# Altium PCB LedBlinker Rats Nest.PcbDoc
Units mil, origin at the board's own origin, x right, y up, seen from the top; angles counter-clockwise.
Board outline 1050 x 1050 mil, 2 copper layers (Top Layer, Bottom Layer), stack 64.8 mil thick; 27 components, 31 nets, 96 pads, 0 vias.
Unrouted connection lines stored in the file: 54.
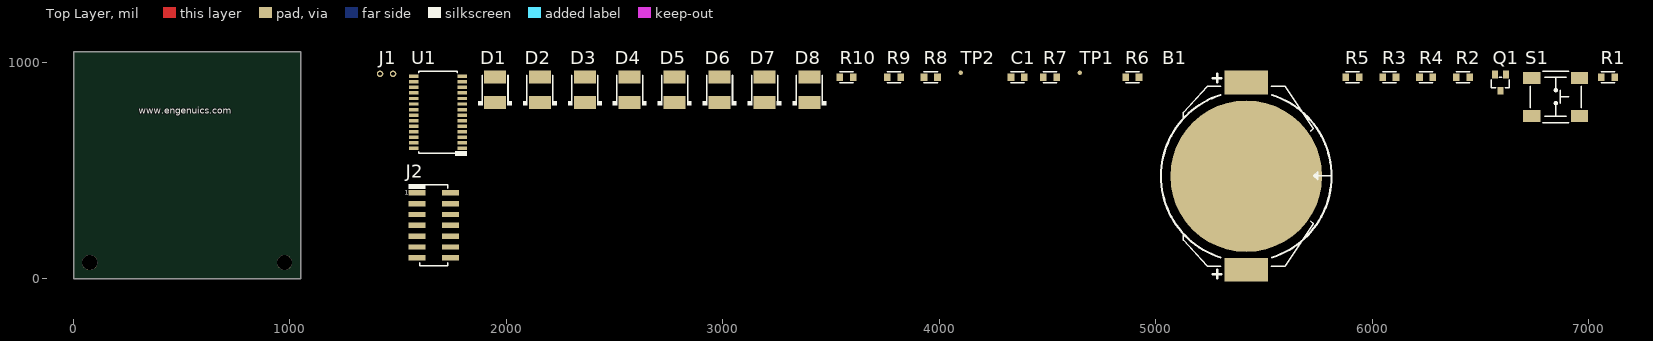
[diagram p0: Top Layer view]
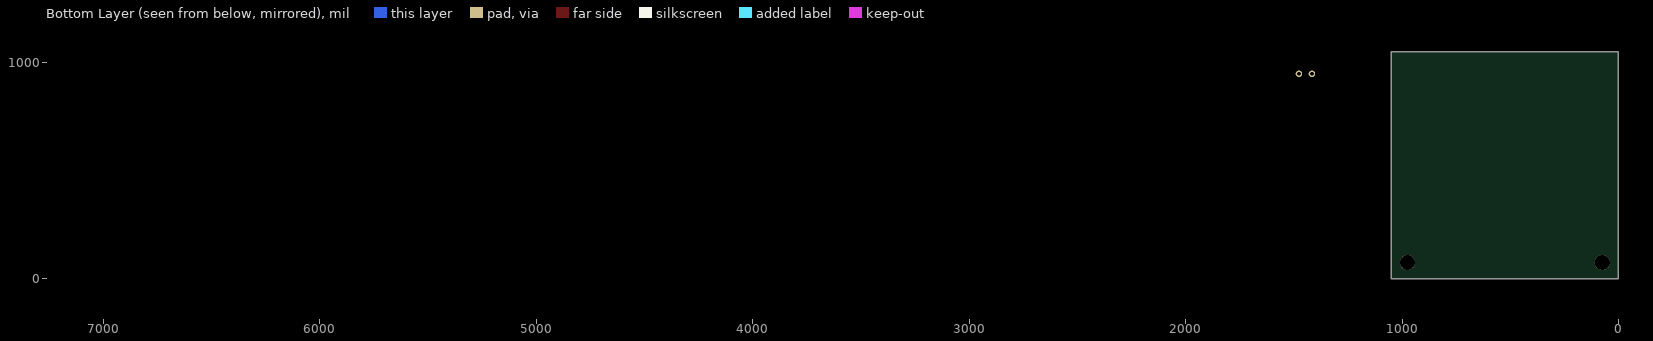
[diagram p1: Bottom Layer view, seen from below]

## Layer stack, top to bottom
Top Layer: signal copper 1.4
Dielectric: core 62, FR-4, Dk 4.8
Bottom Layer: signal copper 1.4

## Board outline
0,0 0,1050 1050,1050 1050,0

## Design rules (kind name [scope] priority, off if disabled: settings)
Clearance ClearancePolygon [All vs InPoly] p1: gap=20
Clearance [All] p2: gap=7
HoleSize [All] p1: absolutevalues=TRUE maxlimit=250 minlimit=17 maxpercent=80.000 minpercent=20.000
MinimumSolderMaskSliver [All] p1 off: minsoldermaskwidth=10
PolygonConnect PolygonConnectVia [All vs IsVia] p1: connectstyle=Direct reliefconductorwidth=10 reliefentries=4 polygonreliefangle="90 Angle" airgapwidth=10
PolygonConnect [All] p2: connectstyle=Relief reliefconductorwidth=10 reliefentries=4 polygonreliefangle="90 Angle" airgapwidth=10
RoutingVias [All] p1: holewidth=17 width=26 viastyle="Through Hole" minholewidth=17 minwidth=26 maxholewidth=200 maxwidth=250
SilkToSilkClearance [All] p1 off: silktosilkclearance=10
SilkToSolderMaskClearance SilkscreenOverComponentPads [IsPad] p1 off: minsilkscreentomaskgap=7 clearancetoexposedcopper=TRUE
SolderMaskExpansion [All] p1: expansion=0
Width [All] p1: maxlimit=250 minlimit=7 preferedwidth=10
24 further rules are at their usual default settings.

## Components (designator, comment, footprint, x,y, rotation, side; value= is the part's Value field where it differs from the comment)
B1 "CR2032" "CONN BATTERY HOLDER CR2032" 5417,474 r90 top
C1 "1uF" 0603 4361,932 r0 top
D1 "GRN" "PLCC-2 AK" 1947,873 r0 top
D2 "RED" "PLCC-2 AK" 2154,873 r0 top
D3 "GRN" "PLCC-2 AK" 2362,873 r0 top
D4 "RED" "PLCC-2 AK" 2569,873 r0 top
D5 "GRN" "PLCC-2 AK" 2777,873 r0 top
D6 "RED" "PLCC-2 AK" 2984,873 r0 top
D7 "GRN" "PLCC-2 AK" 3192,873 r0 top
D8 "RED" "PLCC-2 AK" 3399,873 r0 top
J1 "RESET PADS" "JUMPER POINTS" 1446,947 r0 top
J2 "JTAG/SERIAL" "CONN 14POS 7X2 SMT FEMALE SMALL" 1664,247 r0 top
Q1 "DMG1013" SC-70-3 6591,906 r0 top
R1 "100k" 0603 7088,932 r0 top
R2 "390R" 0603 6418,932 r0 top
R3 "100k" 0603 6078,932 r0 top
R4 "390R" 0603 6248,932 r0 top
R5 "390R" 0603 5908,932 r0 top
R6 "390R" 0603 4891,932 r0 top
R7 "390R" 0603 4511,932 r0 top
R8 "390R" 0603 3960,932 r0 top
R9 "390R" 0603 3790,932 r0 top
R10 "390R" 0603 3571,932 r0 top
S1 "TL3301" "SWITCH TACT SMT TL3301 J LEAD" 6846,840 r0 top
TP1 "A" "TEST POINT SMT TINY" 4648,952 r90 top
TP2 "S" "TEST POINT SMT TINY" 4098,952 r90 top
U1 "MSP430F2122" TSSOP28 1684,769 r90 top

## Footprints (in the part's own frame and the unit in brackets; to place one, negate y for a bottom-side part, rotate by r counter-clockwise, add the part's x,y. Pads: shape width x height; smd on the part's side, far side on the other; paste and mask are expansions set on the pad)
0603 [mil]
  rect 31x35 smd: 1(-31,0) 2(31,0)
  silkscreen extent -31,-26 31,26
"CONN 14POS 7X2 SMT FEMALE SMALL" [mm]
  rect 2x0.63 smd: 1(-1.95,3.81) 2(1.95,3.81) 3(-1.95,2.54) 4(1.95,2.54) 5(-1.95,1.27) 6(1.95,1.27) 7(-1.95,0) 8(1.95,0) 9(-1.95,-1.27) 10(1.95,-1.27) 11(-1.95,-2.54) 12(1.95,-2.54) 13(-1.95,-3.81) 14(1.95,-3.81)
  silkscreen extent -2.95,-4.75 1.65,4.85
"CONN BATTERY HOLDER CR2032" [mm]
  rect 2.79x5.08 smd: +(-10.985,0) +(10.985,0)
  round 17.78 smd: -(0,0)
  silkscreen extent -11.99,-10 12,10
"JUMPER POINTS" [mil]
  round 30 hole 17: 1(-30,0) 2(30,0)
"PLCC-2 AK" [mil]
  rect 102x59 smd: A(0,59) K(0,-59)
  silkscreen extent -79,-72 79,68
SC-70-3 [mm]
  rect 0.7x0.9 smd paste+0 mask+0: 1(0.65,0.95) 2(-0.65,0.95) 3(0,-0.95)
  silkscreen extent -1.05,-0.6 1.05,0.65
"SWITCH TACT SMT TL3301 J LEAD" [mil]
  rect 80x55 smd: 1(-110,-88.5) 2(110,-88.5) 3(-110,88.5) 4(110,88.5)
  silkscreen extent -118,-118 118,118
"TEST POINT SMT TINY" [mm]
  round 0.5 smd paste-100: 1(0,0)
TSSOP28 [mm]
  rect 0.4x1.1 smd: 1(-4.225,-2.85) 2(-3.575,-2.85) 3(-2.925,-2.85) 4(-2.275,-2.85) 5(-1.625,-2.85) 6(-0.975,-2.85) 7(-0.325,-2.85) 8(0.325,-2.85) 9(0.975,-2.85) 10(1.625,-2.85) 11(2.275,-2.85) 12(2.925,-2.85) 13(3.575,-2.85) 14(4.225,-2.85) 15(4.225,2.85) 16(3.575,2.85) 17(2.925,2.85) 18(2.275,2.85) 19(1.625,2.85) 20(0.975,2.85) 21(0.325,2.85) 22(-0.325,2.85) 23(-0.975,2.85) 24(-1.625,2.85) 25(-2.275,2.85) 26(-2.925,2.85) 27(-3.575,2.85) 28(-4.225,2.85)
  silkscreen extent -5.13,-3.38 4.8,2.25

## Part data
B1: library part "CONN BATTERY HOLDER CR2032", "3V Coincell Battery"
C1: library part "CAPACITOR NON-POLARIZED"
D1 D2 D3 D4 D5 D6 D7 D8: library part "LED AK"
J1: library part "CONN SIP 2"
J2: library part "CONN JTAG/SERIAL DEBUG 14POS FEMALE"
Q1: library part "TRANS PMOS 1G 2S 3D"
R1 R2 R3 R4 R5 R6 R7 R8 R9 R10: library part RESISTOR
S1: library part "SWITCH SPST TL3301 JLEAD", "SPST TACT SWITCH"
TP1 TP2: library part "TEST POINT SMT"
U1: library part "MCU MSP430F2122 TSSOP28 LED BLINKER"

## Free pads (board coordinates)
  round 70 hole 70 unplated paste-100 mask-100: ""(75,75) ""(975,75)

## Nets (pads, with @x,y where several pads share a name; then routed paths per layer and width w, separated by ;. In a path a pad name is that pad's centre, name@x,y a point inside that pad or via, vN(x,y) a via of type N, cw(c..) or ccw(c..) an arc to the next point about the centre after c; other vN are vias at no path point)
GND: B1.- C1.2 D1.K D2.K D3.K D4.K D5.K D6.K D7.K D8.K J1.1 J2.13 Q1.1 S1.1 S1.2 U1.4
LED1: R10.1 U1.23
LED2: R9.1 U1.22
LED3: R8.1 U1.17
LED4: R7.1 U1.13
LED5: R6.1 U1.12
LED6: R5.1 U1.11
LED7: R4.1 U1.10
LED8: R2.1 U1.24
NetD1_A: D1.A R10.2
NetD2_A: D2.A R9.2
NetD3_A: D3.A R8.2
NetD4_A: D4.A R7.2
NetD5_A: D5.A R6.2
NetD6_A: D6.A R5.2
NetD7_A: D7.A R4.2
NetD8_A: D8.A R2.2
NetR1_1: R1.1 S1.3 S1.4 U1.21
NetTP1_1: TP1.1 U1.8
NetTP2_1: TP2.1 U1.9
PIMO: J2.12 U1.16
POMI: J2.14 U1.15
RST: J1.2 J2.11 R3.1 U1.7
TCK: J2.7 U1.25
TDI: J2.3 U1.27
TDO: J2.1 U1.28
TEST: J2.8 U1.1
TICK: J2.10 U1.3
TMS: J2.5 U1.26
VBAT: B1.+ Q1.3
VCC: C1.1 J2.9 Q1.2 R1.2 R3.2 U1.2
pads on no net: J2.2 J2.4 J2.6 U1.5 U1.6 U1.14 U1.18 U1.19 U1.20

## Silkscreen, mask and mechanical layers (free items; w line width, h text height)
Top Overlay:
  text "www.engenuics.com" at 301,763 h30
Mechanical 1:
  the board outline again, w7
Mechanical 5:
  region: 343,596 326.74,612.26 288.55,574.08 304.82,557.82
  region: 845.46,741.4 859.61,755.54 841.93,773.22 827.79,759.08
  region: 944.46,840.39 958.6,854.54 940.92,872.21 926.78,858.07
  region: 308.6,845.46 294.46,859.61 276.78,841.93 290.92,827.79
  region: 209.61,944.46 195.46,958.6 177.79,940.92 191.93,926.78
  region: 205,599 185,599 185,574 205,574
  region: 65,599 45,599 45,574 65,574
  rectangle: 985,451 1005,476
  rectangle: 845,451 865,476
  region: 105.54,210.61 91.4,196.46 109.08,178.79 123.22,192.93
  region: 204.54,309.6 190.39,295.46 208.07,277.78 222.21,291.92
  region: 451,205 451,185 476,185 476,205
  region: 451,65 451,45 476,45 476,65
  region: 840.39,105.54 854.54,91.4 872.21,109.08 858.07,123.22
  region: 741.4,204.54 755.54,190.39 773.22,208.07 759.08,222.21
  region: 599,843 599,863 574,863 574,843
  region: 599,983 599,1003 574,1003 574,983
  lines w7: 329.02,594.42 453.47,718.87 ; 454.02,718.42 458.97,713.47 ; 590.65,334.21 596.31,328.55 720.76,453 715.1,458.66 ; 65,439 185,439 185,454 185,609 65,609 65,439 ; 96.47,217.68 107.08,207.07 216.68,97.47 301.53,182.32 181.32,302.53 96.47,217.68 ; 96.47,831.32 181.32,746.47 191.93,757.08 301.53,866.68 216.68,951.53 96.47,831.32 ; 439,65 439,185 609,185 609,65 454,65 439,65 ; 442,863 442,983 612,983 612,863 457,863 442,863 ; 746.47,181.32 831.32,96.47 841.93,107.08 951.53,216.68 866.68,301.53 746.47,181.32 ; 746.47,868.68 757.08,858.07 866.68,748.47 951.53,833.32 831.32,953.53 746.47,868.68 ; 865,439 985,439 985,454 985,609 865,609 865,439
Mechanical 6:
  rectangle: 2,936 32,1016
  lines w5: 797,900 841,900 ; 841,866 841,934 ; 6,786 380,786 380,1014 6,1014 6,786 ; 744,780 744,1016 980,1016 980,780 744,780
  lines w7: 7,835 21,835 ; 109,305 109,239.33 303.6,109.6 322.5,128.5 ; 109,540 109,600.42 228.55,710 296,710 ; 365,835 379,835 ; 365,965 379,965 ; 508,99 538,99 533,104 513,104 ; 523,35.67 523,114 ; 727,126 744,109 939,239 939,310 ; 756,710 819.27,710 939,600.25 939,540 ; 523,114 543,94 503,94 523,114

## Dimensions
1050,1050 to 1050,0 on Mechanical 5
0,1050 to 1050,1050 on Mechanical 5

## Text inside footprints (layer, text, board x,y; h text height)
J2: Top Overlay "1" at 1529.16,387.75 h20